# EAGLE board schema (EAGLE 7.2.0)
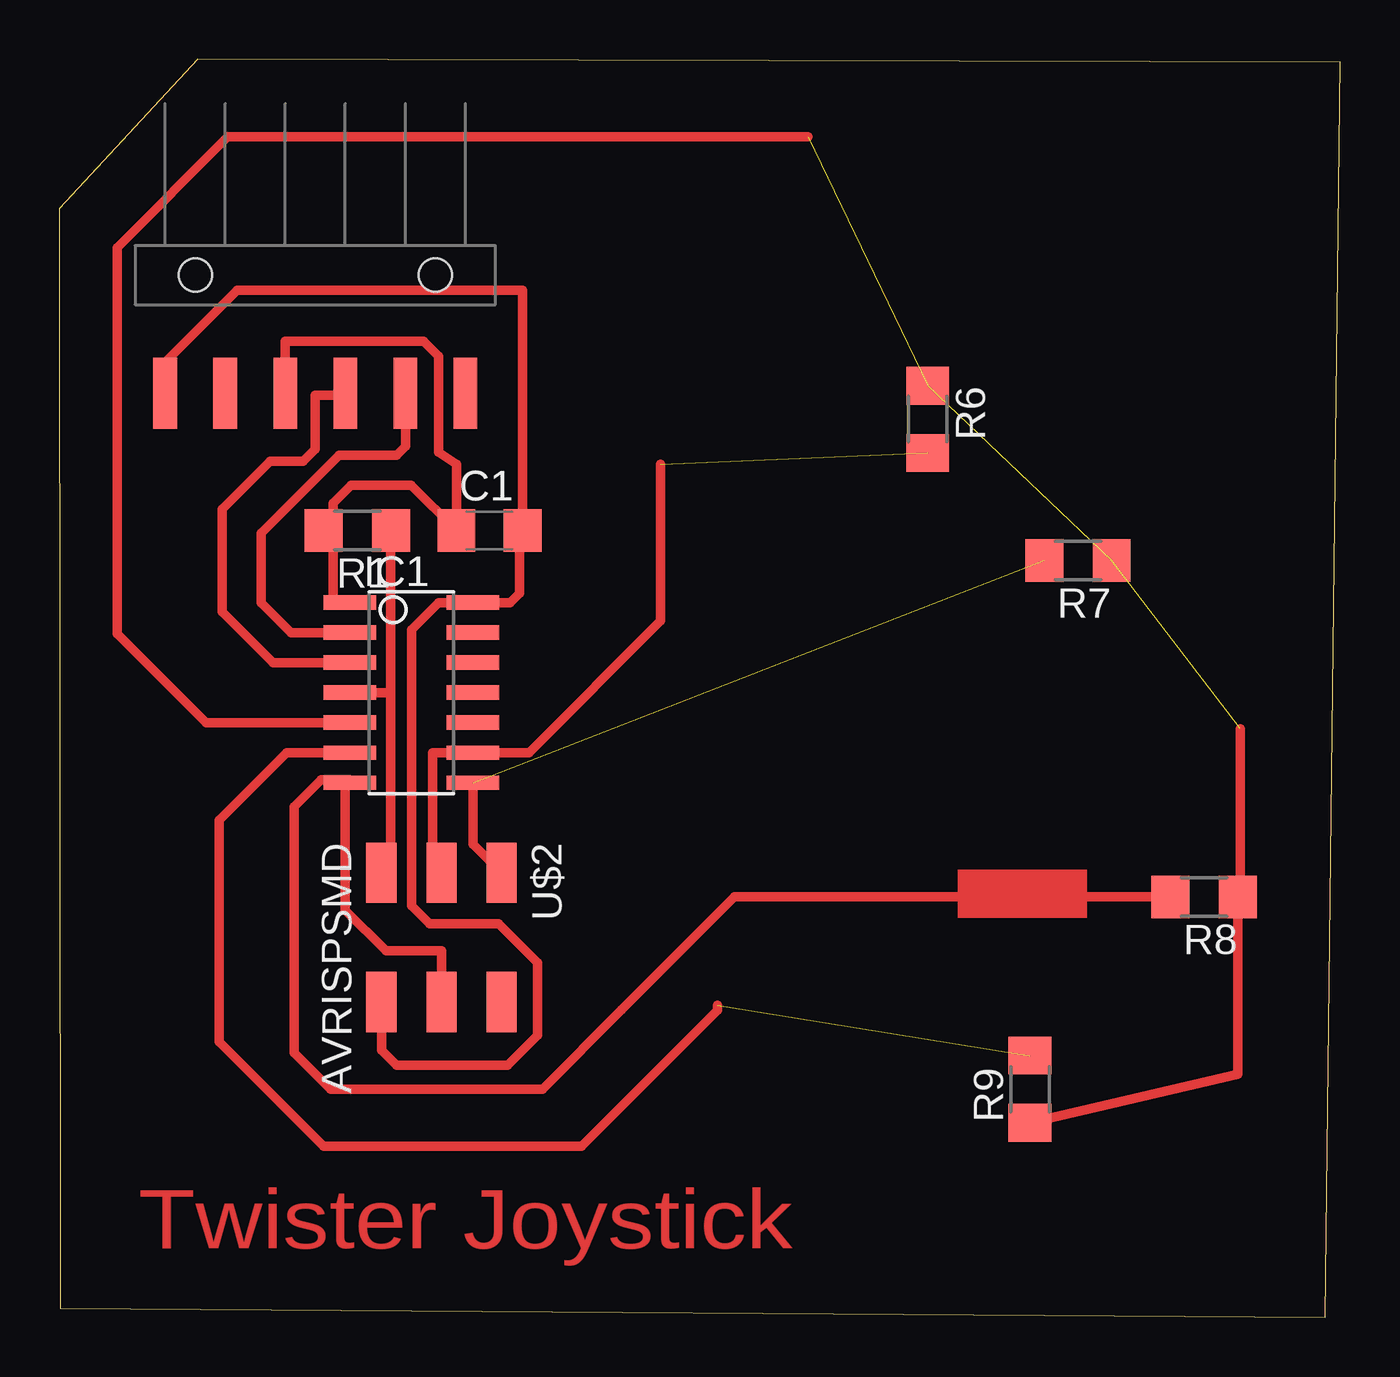
[diagram p0: board, top side]

Size 54.19 x 53.2 mm. Coordinates in mm from the lower left corner, seen from the top.
Outline: 0.04,0.38 53.56,0 54.19,53.08 5.86,53.2 0,46.88 0.04,0.38
Copper layers 1: Top 0.035mm
Design rules "ERP-1sided-10mil-16mill": minimum track width 10mil, minimum drill 24mil, track to track 16mil, track to pad 16mil, pad to pad 16mil, via to via 16mil, smd to smd 0mil, copper to edge 16mil, drill to drill 36mil, minimum pad ring 10mil, minimum via ring 8mil, stop-mask expansion 4mil, vias tented up to drill 0mil, thermal gap 10mil

## Footprints (pad centres in the part's own frame; a part is rotated, then mirrored left to right if it is on the bottom)
C1206 = smd 1.6 x 1.8: 1 -1.4,0; 2 1.4,0
SOIC14 = smd 0.61 x 2.21: 1 -3.81,-2.603; 2 -2.54,-2.603; 3 -1.27,-2.603; 4 0,-2.603; 5 1.27,-2.603; 6 2.54,-2.603; 7 3.81,-2.603; 8 3.81,2.603; 9 2.54,2.603; 10 1.27,2.603; 11 0,2.603; 12 -1.27,2.603; 13 -2.54,2.603; 14 -3.81,2.603
1X06-SMD = smd 1 x 3: 1 -6.35,5; 2 -3.81,5; 3 -1.27,5; 4 1.27,5; 5 3.81,5; 6 6.35,5 | hole 1.4: -5.08,0; 5.08,0
R1206 = smd 1.6 x 1.803: 1 -1.422,0; 2 1.422,0
1206 = smd 1.6 x 1.803: 1 -1.422,0; 2 1.422,0
2X03SMD = smd 2.54 x 1.27: 1 -2.54,2.54; 2 2.92,2.54; 3 -2.54,0; 4 2.92,0; 5 -2.54,-2.54; 6 2.92,-2.54

## Placement (x,y rotation side)
C1  1uf  [C1206]  18.2,33.27 0 top
IC1  ATTINY44-SSU  [SOIC14]  14.9,26.42 270 top
JP1  [1X06-SMD]  10.84,44.07 180 top
R1  10k  [R1206]  12.61,33.27 180 top
R6  1M  [1206]  36.74,37.97 270 top
R7  1M  [1206]  43.09,32 180 top
R8  1M  [1206]  48.43,17.78 180 top
R9  1M  [1206]  41.06,9.65 90 top
U$2  AVRISPSMD  [2X03SMD]  16.17,16.26 270 top

## Library data of the parts
C1 = rcl
IC1 U$2 = fab
JP1 = SparkFun
R1 = resistor
R6-R9 = 01_FAB_Hello

## Nets
CTS: JP1.5
GND: C1.2 IC1.14 JP1.6 U$2.6
PAD0: IC1.13
PAD1: IC1.12
PAD2: IC1.11
PAD3: IC1.10
PAD4/SCK: IC1.9 R6.2 U$2.3
PAD5/MISO: IC1.8 R7.2 U$2.1
PAD6/MOSI: IC1.7 R8.2 U$2.4
PAD7: IC1.6 R9.2
RST: IC1.4 R1.1 U$2.5
RTS: JP1.1
RX: IC1.2 JP1.2
STEP: IC1.5 R6.1 R7.1 R8.1 R9.1
TX: IC1.3 JP1.3
VCC: C1.1 IC1.1 JP1.4 R1.2

## Tracks (layer width: path | path; a pad name or v marks a point on that pad's centre or on a via)
GND
  Top 0.406: C1.2 19.47,33.27 19.47,30.63 19.07,30.23 IC1.14 16.04,30.23 14.9,29.08 14.9,17.4 15.66,16.64 18.58,16.64 20.23,14.99 20.23,11.94 18.96,10.67 14.27,10.67 13.63,11.3 U$2.6 | C1.2 19.6,33.15 | JP1.6 4.49,40.39 7.53,43.43 19.6,43.43 C1.2
PAD4/SCK  (1 unrouted)
  Top 0.406: U$2.3 15.79,18.8 15.79,23.88 IC1.9 19.87,23.88 25.44,29.45 25.44,36.07
PAD5/MISO  (1 unrouted)
  Top 0.406: IC1.8 17.5,20 U$2.1
PAD6/MOSI
  Top 0.406: U$2.4 16.17,15.49 13.83,15.49 12.11,17.22 12.11,22.61 IC1.7 12.3,22.73 11.09,22.73 9.95,21.59 9.95,11.18 11.48,9.65 20.44,9.65 23.79,13 28.57,17.78 R8.2
PAD7  (1 unrouted)
  Top 0.406: IC1.6 9.63,23.88 6.77,21.02 6.77,11.66 11.2,7.24 22.1,7.24 27.85,12.99 27.85,13.21
RST
  Top 0.406: R1.1 14.01,33.27 14.01,26.42 | IC1.4 14.01,26.42 | U$2.5 14.01,18.8 14.01,26.42
RX
  Top 0.406: IC1.2 9.82,28.96 8.55,30.23 8.55,33.15 11.85,36.45 14.27,36.45 14.65,36.83 JP1.2
STEP  (3 unrouted)
  Top 0.406: R9.1 49.85,10.29 R8.1 49.95,17.78 49.95,24.89 | IC1.5 6.22,25.15 2.45,28.92 2.45,45.23 7.14,49.91 31.66,49.91
TX
  Top 0.406: IC1.3 9.06,27.69 6.9,29.84 6.9,34.16 8.93,36.2 10.33,36.2 10.84,36.7 10.84,38.99 12.03,38.99 JP1.3
VCC
  Top 0.406: R1.2 11.6,33.27 | 11.6,33.27 11.6,30.23 IC1.1 | 11.6,33.27 11.6,34.42 12.36,35.18 14.9,35.18 C1.1 16.8,36.07 16.04,36.58 16.04,40.64 15.41,41.27 9.57,41.27 JP1.4
(copper drawn outside any net)
  shapes: Top area x1

## Text on the board
Top: Twister Joystick